# EAGLE board esquema (EAGLE 6.4)
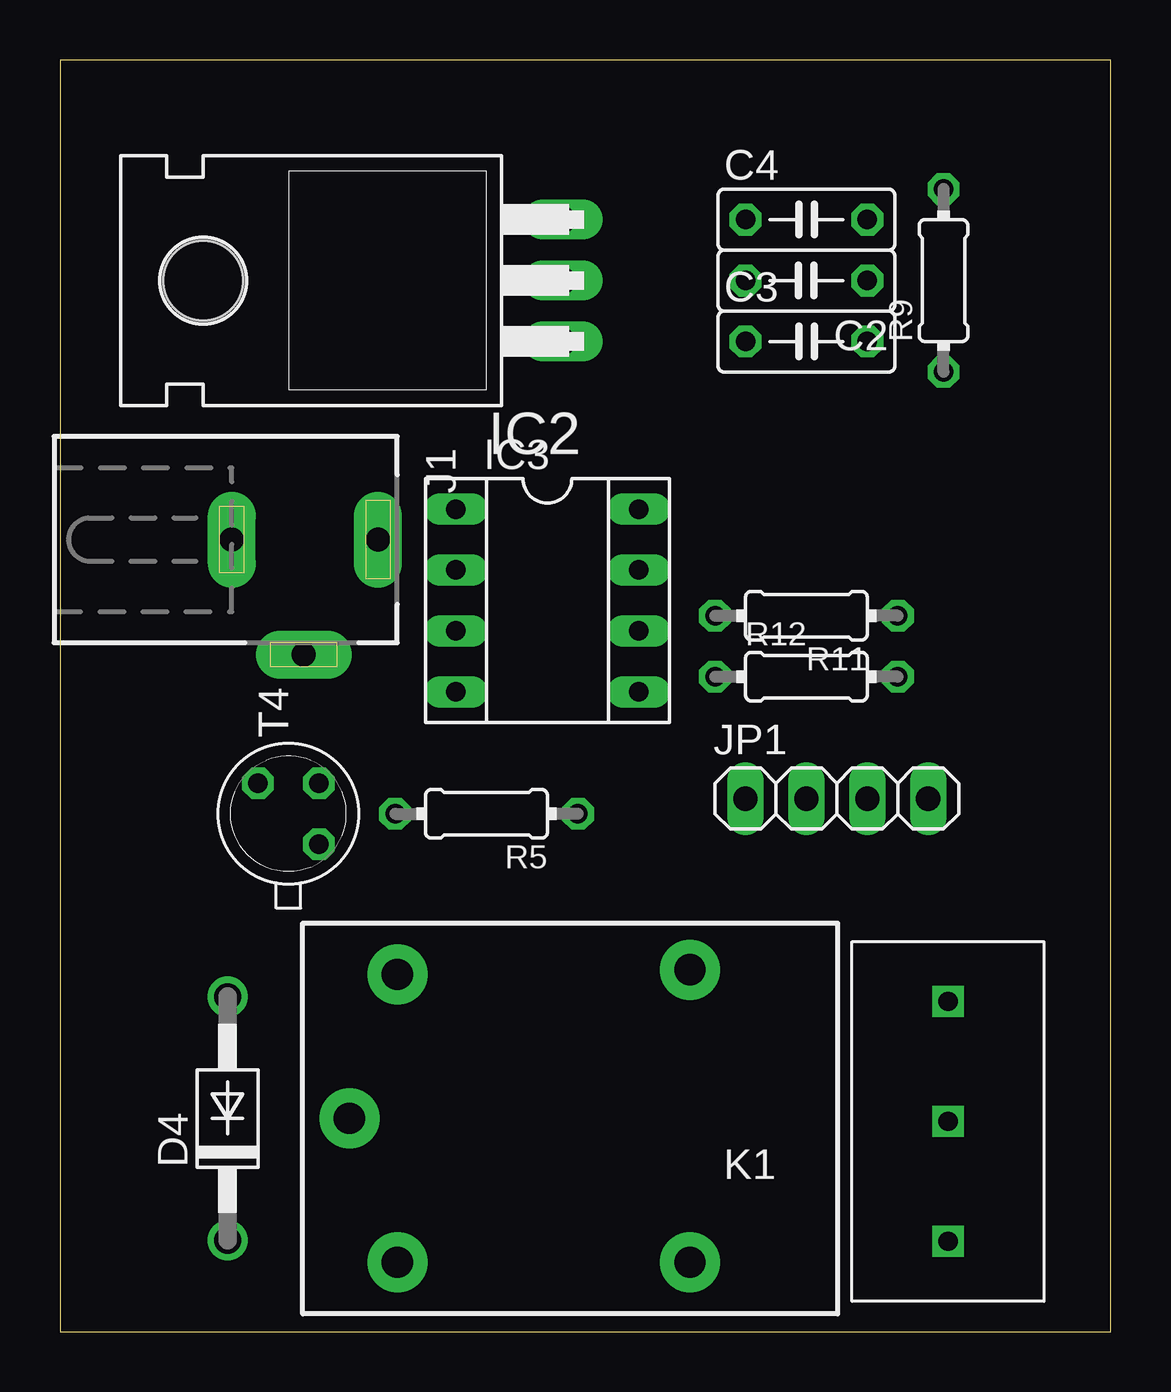
[diagram p0: board, top side]
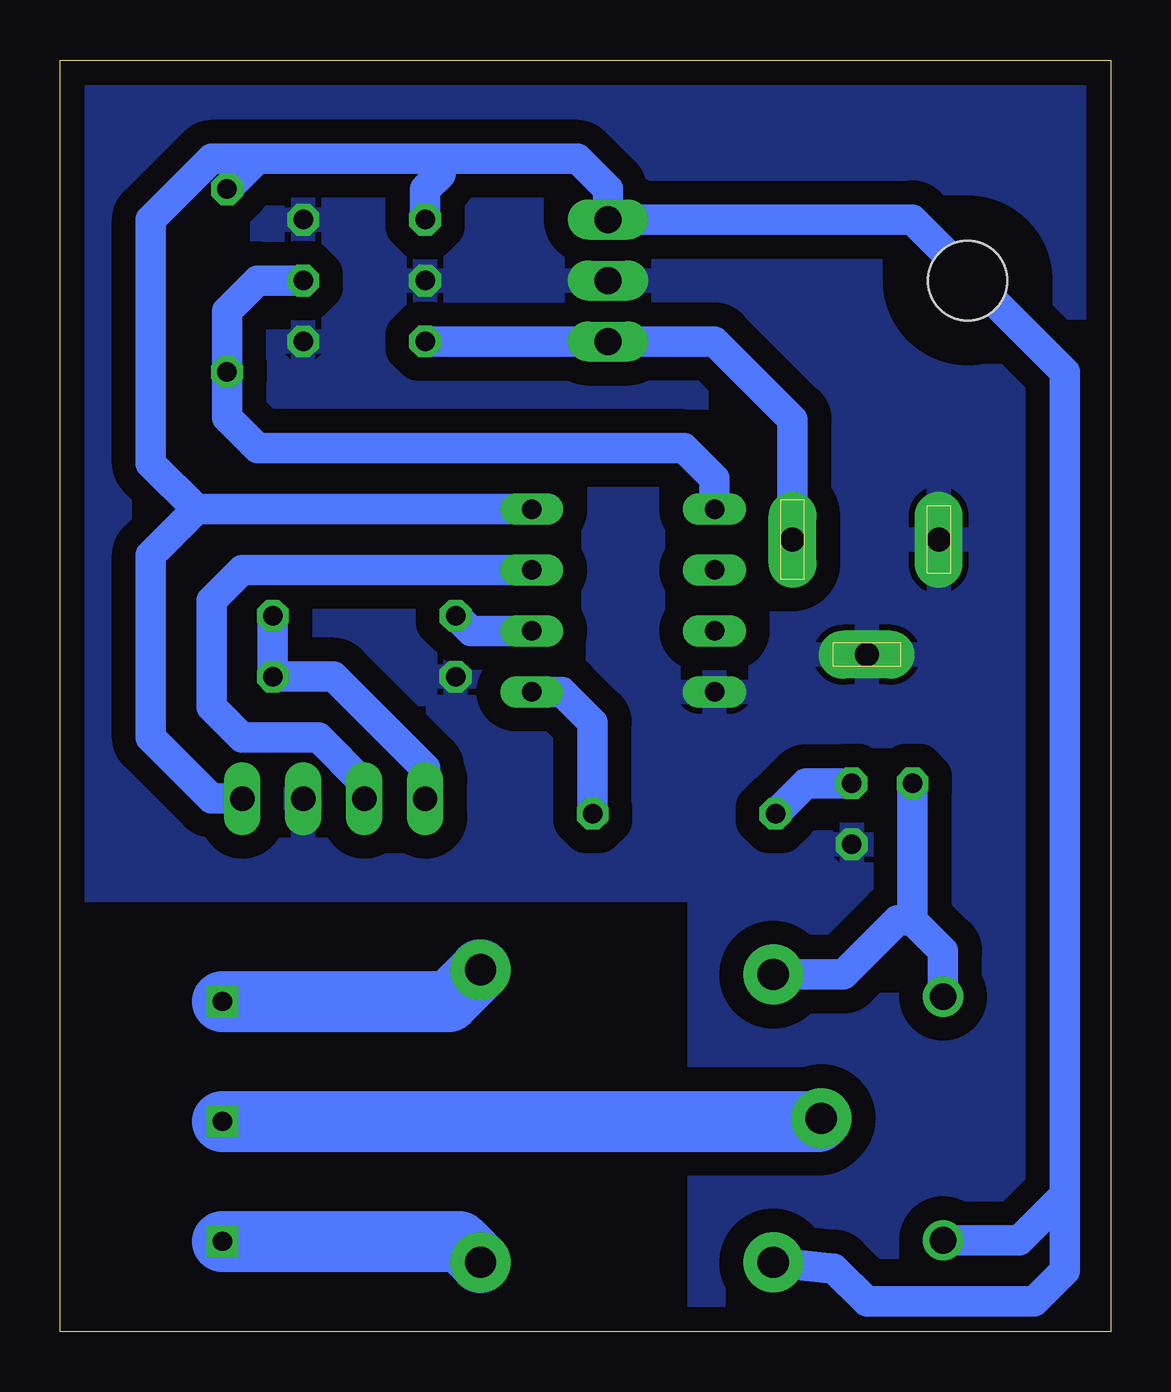
[diagram p1: board, bottom side, seen from below]

Size 43.8 x 53.01 mm. Coordinates in mm from the lower left corner, seen from the top.
Outline: 0,0 43.8,0 43.8,53.01 0,53.01 0,0
Copper layers (1*16): Top 0.035mm / dielectric 1.5mm / Bottom 0.035mm
Design rules "default": minimum track width 10mil, minimum drill 24mil, track to track 8mil, track to pad 8mil, pad to pad 8mil, via to via 8mil, smd to smd 8mil, copper to edge 40mil, drill to drill 8mil, minimum pad ring 10mil, minimum via ring 8mil, stop-mask expansion 4mil, vias tented up to drill 0mil, thermal gap 10mil

## Footprints (pad centres in the part's own frame; a part is rotated, then mirrored left to right if it is on the bottom)
C050-025X075 = drill 0.813 octagon: 1 -2.54,0; 2 2.54,0
DO41-10 = drill 1.118: A 5.08,0; C -5.08,0
TO220H = drill 1.118 long: 1 -2.54,-10.16; 2 0,-10.16; 3 2.54,-10.16 | hole 3.302: 0,4.826
SOCKET-08 = drill 0.813 long: 1 -3.81,-3.81; 2 -1.27,-3.81; 3 1.27,-3.81; 4 3.81,-3.81; 5 3.81,3.81; 6 1.27,3.81; 7 -1.27,3.81; 8 -3.81,3.81
DCJ0202 = drill 1 pad 2 long: 1 0,3.1; 2 4.8,0; 3 0,-3
1X04 = drill 1.016 long: 1 -3.81,0; 2 -1.27,0; 3 1.27,0; 4 3.81,0
ZN5 = drill 1.3 pad 2.5: 11 8.89,0; 12 -5.31,-6.2; 14 -5.31,6; A1 6.89,6; A2 6.89,-6
0204/7 = drill 0.813 octagon: 1 -3.81,0; 2 3.81,0
TO18 = drill 0.813 octagon: 1 -1.27,-1.27; 2 1.27,-1.27; 3 1.27,1.27
POT_CONNECTOR = drill 0.8 square: 1 4,12.5; 2 4,7.5; 3 4,2.5

## Placement (x,y rotation side)
C2  22pF  [C050-025X075]  31.11,43.81 180 top
C3  330nF  [C050-025X075]  31.11,41.27 0 top
C4  100nF  [C050-025X075]  31.11,46.35 0 top
D4  1N4004  [DO41-10]  6.99,8.89 90 top
IC2  7805T  [TO220H]  10.79,43.81 90 top
IC3  [SOCKET-08]  20.32,30.48 270 top
J1  DCJ0202  [DCJ0202]  10.16,33.02 270 top
JP1  [1X04]  32.38,22.23 0 top
K1  ZNS5106  [ZN5]  20.95,8.89 180 top
R5  680  [0204/7]  17.78,21.59 180 top
R9  10k  [0204/7]  36.83,43.81 90 top
R11  100  [0204/7]  31.11,29.84 180 top
R12  200  [0204/7]  31.11,27.3 0 top
T4  2N2222  [TO18]  9.53,21.59 90 top
U$1  POT_CONNECTOR  [POT_CONNECTOR]  33.02,1.27 0 top

## Library data of the parts
C2-C4 R5 R9 R11 R12 = rcl
D4 = diode
IC2 = linear
IC3 = ic-package
J1 = con-jack; OC_FARNELL: unknown; OC_NEWARK: unknown
JP1 = pinhead
K1 = relay; OC_FARNELL: unknown; OC_NEWARK: unknown
T4 = transistor
U$1 = mi_lib

## Nets
GND: C2.2 C3.2 C4.2 IC2.2 IC3.4 J1.2 J1.3 JP1.3 R12.1 T4.1
N$1: IC3.7 JP1.2
N$2: K1.11 U$1.2
N$3: IC3.6 R11.2
N$4: K1.12 U$1.1
N$5: K1.14 U$1.3
N$6: D4.A K1.A2 T4.3
N$16: R5.2 T4.2
N$27: C2.1 IC3.1 R9.1
N$30: C3.1 IC2.1 J1.1
N$36: JP1.1 R11.1 R12.2
N$44: IC3.5 R5.1
VCC: C4.1 D4.C IC2.3 IC3.8 JP1.4 K1.A1 R9.2

## Tracks (layer width: path | path; a pad name or v marks a point on that pad's centre or on a via)
GND
  pour Bottom (isolate 0.99): 43.81,53.34 0,53.34 0,0 17.14,0 17.14,18.41 43.81,18.41
N$1
  Bottom 1.27: JP1.2 31.11,22.86 33.02,24.77 36.2,24.77 37.47,26.04 37.47,30.48 36.2,31.75 IC3.7
N$2
  Bottom 2.54: U$1.2 12.19,8.77 K1.11
N$3
  Bottom 1.27: IC3.6 26.67,29.21 R11.2
N$4
  Bottom 2.54: U$1.1 27.59,13.77 K1.12
N$5
  Bottom 2.54: U$1.3 27.14,3.77 K1.14
N$6
  Bottom 1.27: T4.3 8.26,17.14 | D4.A 6.99,15.88 8.26,17.14 | K1.A2 11.14,14.89 8.89,17.14 8.26,17.14
N$16
  Bottom 1.27: T4.2 12.7,22.86 R5.2
N$27
  Bottom 1.27: IC3.1 16.51,35.56 17.78,36.83 35.56,36.83 36.83,38.1 R9.1 36.83,42.55 35.56,43.81 C2.1
N$30
  Bottom 1.27: J1.1 13.26,38.02 16.51,41.27 IC2.1 C3.1
N$36
  Bottom 1.27: R11.1 R12.2 32.38,27.3 28.57,23.5 JP1.1
N$44
  Bottom 1.27: R5.1 21.59,25.4 22.86,26.67 IC3.5
VCC
  Bottom 1.27: 1.91,5.71 1.91,40.01 8.26,46.35 IC2.3 20.95,47.62 22.23,48.9 27.94,48.9 | D4.C 3.81,3.81 1.91,5.71 | K1.A1 11.53,2.63 10.16,1.27 3.17,1.27 1.91,2.54 1.91,5.71 | JP1.4 37.47,22.23 40.01,24.77 40.01,32.38 38.1,34.29 | IC3.8 38.1,34.29 | 38.1,34.29 40.01,36.2 40.01,46.35 37.47,48.9 35.56,48.9 | 27.94,48.9 35.56,48.9 | R9.2 35.56,48.9 | C4.1 28.57,47.62 27.94,48.26 27.94,48.9